# Altium PCB Wikiot.PcbDoc (part 2 of 2)
Units mil, origin at the board's own origin, x right, y up, seen from the top; angles counter-clockwise.
Board outline 3930 x 3935 mil, 2 copper layers (Top Layer, Bottom Layer); 175 components, 192 nets, 839 pads, 312 vias.
Unrouted connection lines stored in the file: 184.
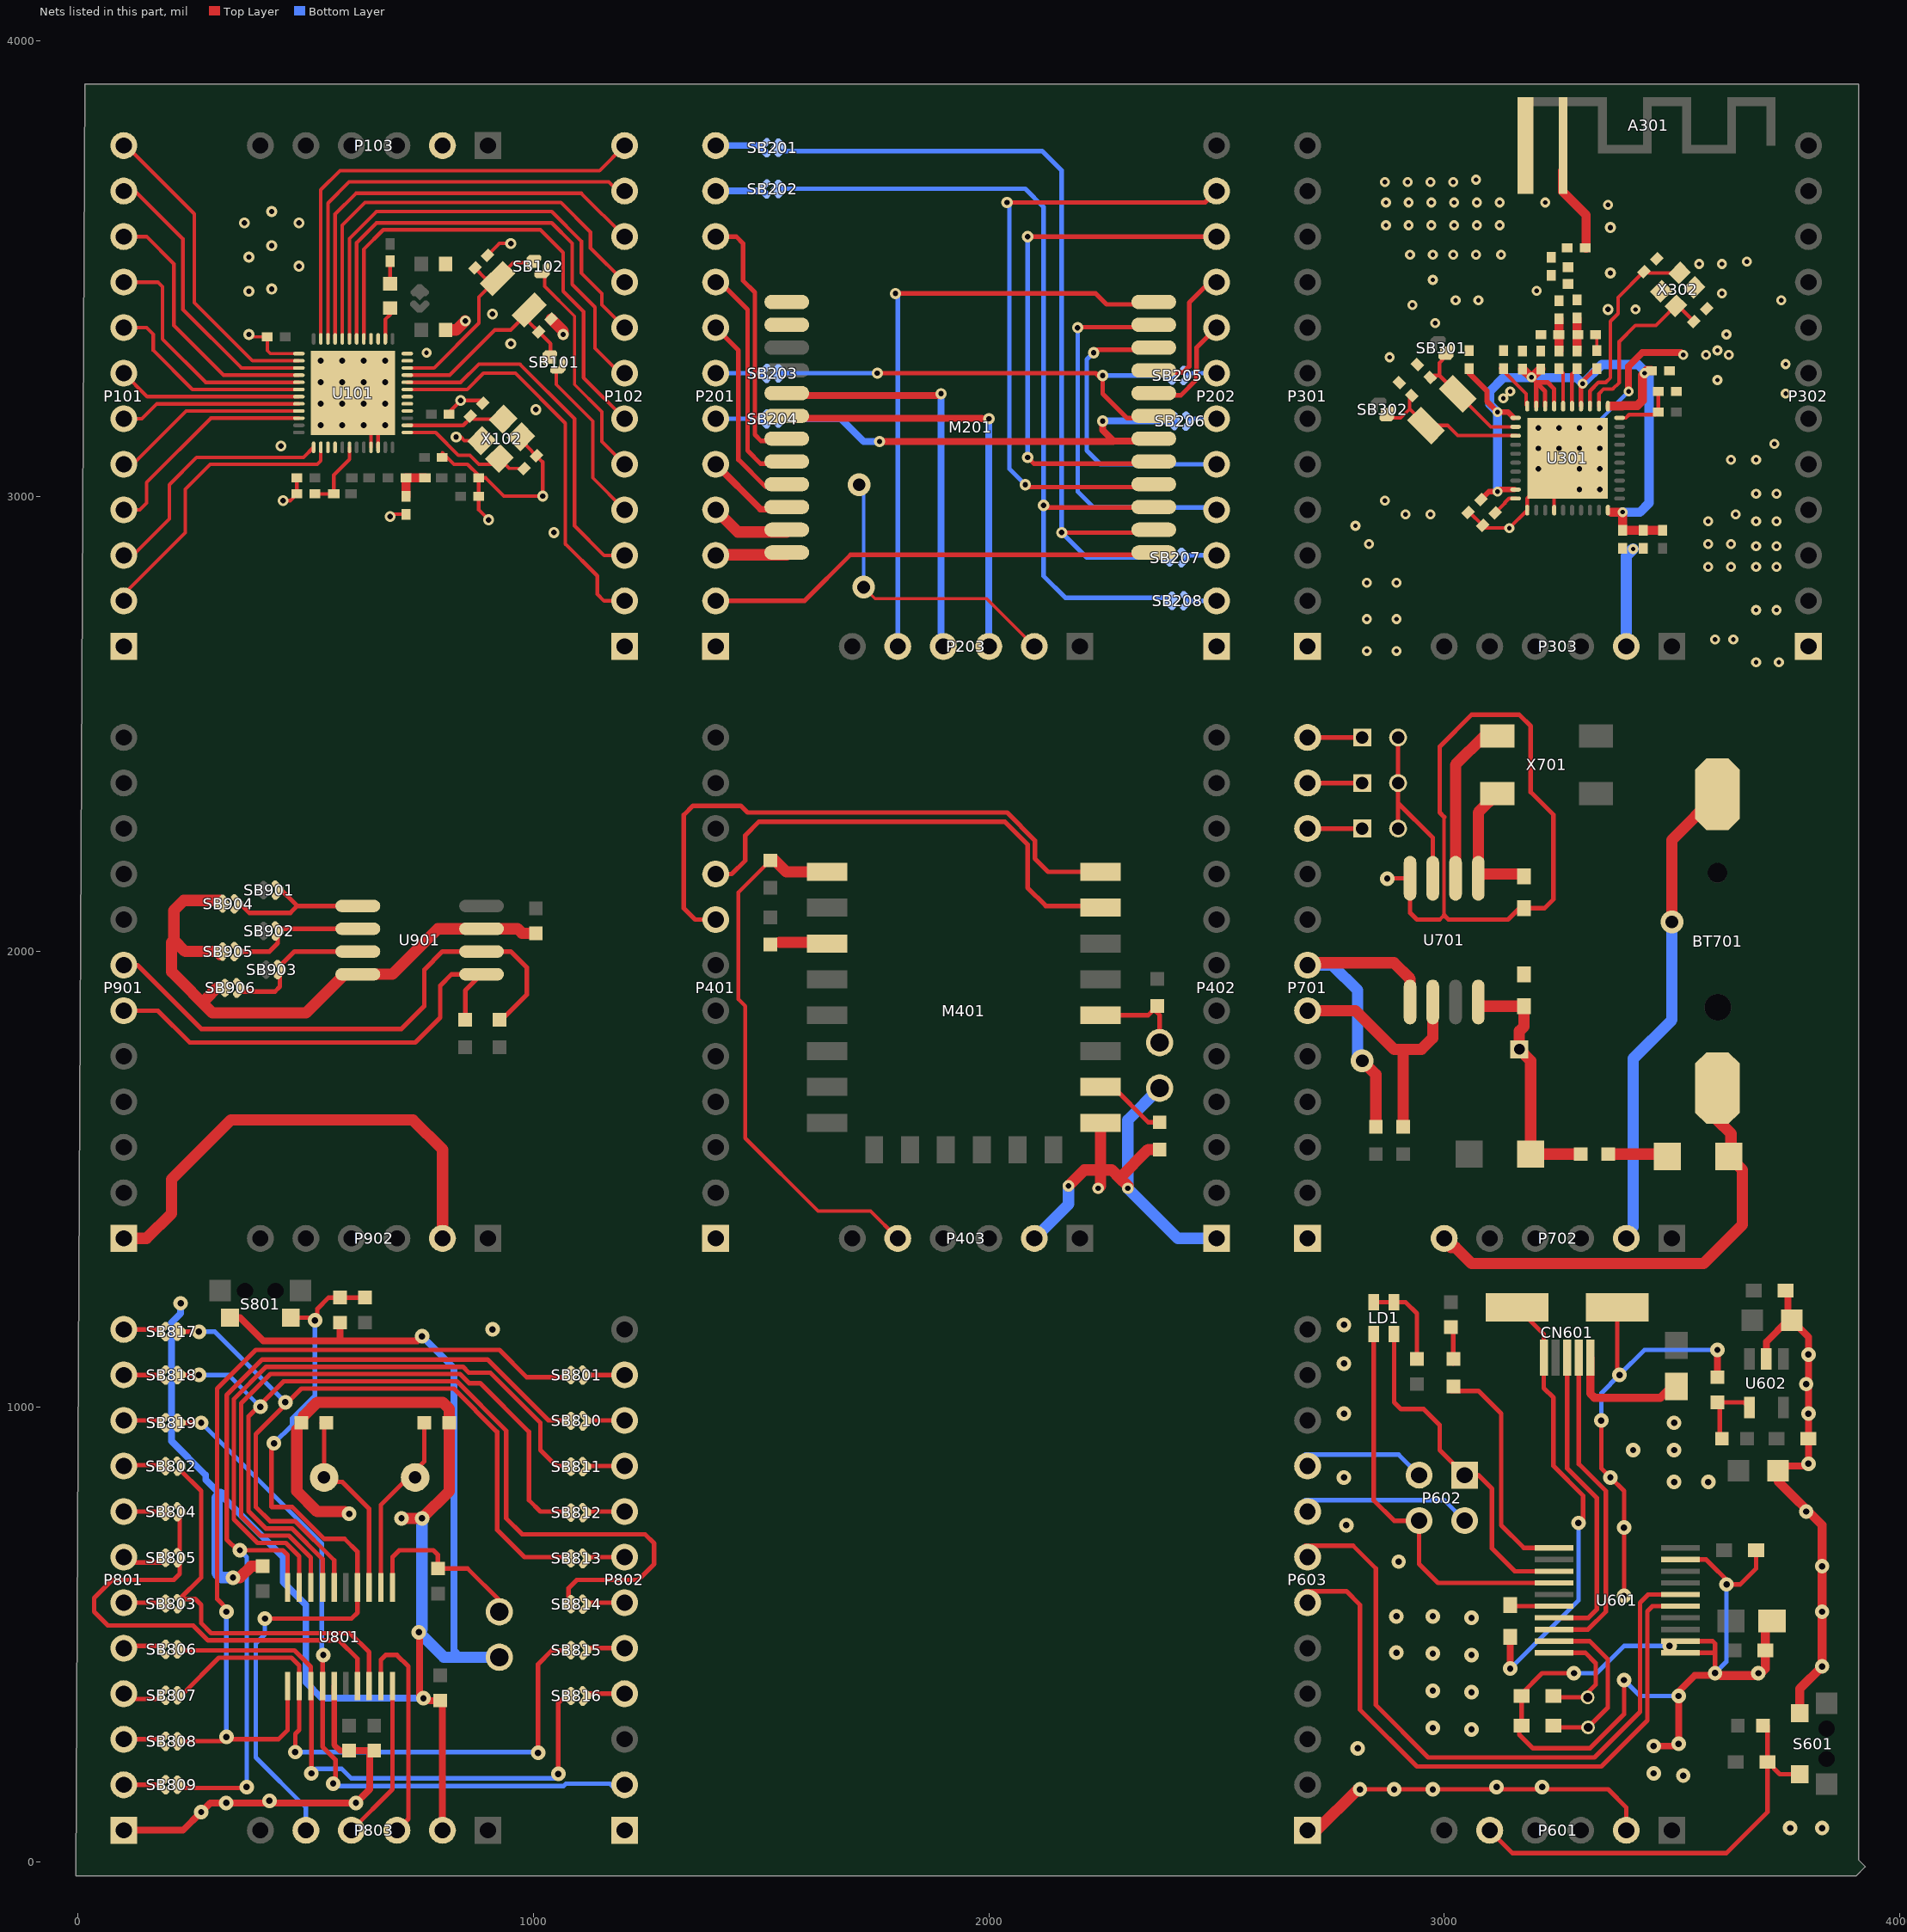
[diagram p2: the nets of this part, all layers, seen from the top]

## Via types
v1: diameter 22, hole 10, Top Layer to Bottom Layer, tented both sides, 125 vias
v2: diameter 32, hole 14, Top Layer to Bottom Layer, 96 vias
v3: diameter 24, hole 12, Top Layer to Bottom Layer, tented both sides, 33 vias
v4: diameter 25, hole 12, Top Layer to Bottom Layer, 19 vias
v5: diameter 25.98, hole 12.99, Top Layer to Bottom Layer, 16 vias
v6: diameter 25, hole 12, Top Layer to Bottom Layer, tented both sides, 13 vias
v7: diameter 50, hole 28, Top Layer to Bottom Layer, 8 vias
v8: diameter 30, hole 15, Top Layer to Bottom Layer, 2 vias

## Nets (pads, with @x,y where several pads share a name; then routed paths per layer and width w, separated by ;. In a path a pad name is that pad's centre, name@x,y a point inside that pad or via, vN(x,y) a via of type N, cw(c..) or ccw(c..) an arc to the next point about the centre after c; other vN are vias at no path point) (continued)
GND: A301.2 BT701.2 C101.2 C102.2 C103.2 C104.2 C105.2 C106.2 C108.1 C109.2 C110.2 C111.2 C112.2 C113.2 C114.2 C115.2 C301.2 C302.2 C303.2 C304.2 C305.2 C306.2 C307.2 C308.2 C310.2 C313.2 C314.2 C315.2 C316.2 C317.2 C318.2 C319.2 C601.1 C602.2 C603.1 C604.1 C605.1 C606.1 C608.1 C609.1 C610.1 C611.1 C701.2 C702.2 C801.1 C802.2 C803.2 C804.2 C805.2 C806.2 C807.2 C901.2 CN601.0 CN601.5 JP401.1 JP801.1 L303.2 M201.1 M201.2 M401.15 P101.1 P102.1 P103.2 P201.1 P202.1 P203.2 P301.1 P302.1 P303.2 P401.1 P402.1 P403.2 P601.2 P603.1 P701.1 P702.2 P801.1 P802.1 P803.2 P901.1 P902.2 R304.1 R403.1 R605.1 S601.1 S801.1 SB904.2 SB905.2 SB906.2 U101.13 U101.33 U101.34 U101.49 U301.1 U301.4 U301.41 U601.11 U601.12 U601.19 U602.2 U701.4 U801.15 U901.4 U901.7 X102.2 X102.4 X302.2 X302.4 | length 20500.5
  Top Layer w7: v3(375,3355) 380,3350 C115.2@415.31,3350 415.31,3319.69 422.01,3312.99 U101.13@484.53,3312.99 ; v7(1725,2800) 1750,2775 1995,2775 P203.2@2100,2670 ; 2999.78,2079.78 2999.78,2295.22 ; L303.2@3332.69,3355 3335,3352.69 C305.2@3335,3319.69
  Top Layer w8: v3(450,2990) 465.31,2990 C114.2@480.31,3005 C113.2@480.31,3040 ; U101.49@603.62,3226.38 U101.49@642.99,3187.01 ; U101.33@642.99,3107.28 U101.49@642.99,3187.01 ; U101.34@658.74,3107.28 658.74,3171.26 U101.49@642.99,3187.01 ; v3(685,2955) 690.31,2960.31 C110.2@720,2960.31 ; 799.69,3095 800,3095 825,3070 855,3070 879.69,3045.31 C111.2@879.69,3040 ; C105.2@814.69,3180 814.69,3184.69 v3(840,3210) 882.84,3210 C103.2@888.92,3203.92 ; v3(830,3130) 840,3130 848.08,3121.92 X102.4@885.99,3121.92 ; C104.2@898.92,3528.92 925,3555 v3(950,3555) ; v3(901.4,2948) 879.69,2969.72 C112.2@879.69,3000 C111.2@879.69,3040 ; X102.2@972.29,3130.27 972.29,3122.71 1020,3075 v3(1020,3000) 935,3000 895,3040 C111.2@879.69,3040 ; 2990,2070 2999.78,2079.78 ; C301.2@3052.55,2964.62 3055.37,2964.62 C315.2@3084.36,2935.62 3089.99,2930 v1(3143.21,2930) U301.1@3182.4,2969.19 3182.4,2994.79 U301.41@3241.46,3053.84 ; U301.4@3241.46,2969.19 U301.41@3241.46,3053.84 ; U301.41@3270.99,3083.37 U301.41@3241.46,3053.84
  Top Layer w10: v2@2810,160 v2(2815,160) v2(2890,160) v2(2975,160) 3360,160 3400,120 P601.2@3400,70 P601.2@3400,50 ; v2@2870,2165 2874.17,2160.83 U701.4@2925,2160.83 2925,2085 2940,2070 2990,2070 ; 2999.78,2079.78 3009.56,2070 3140,2070 3165,2095 C702.2@3175,2095 3220,2095 3240,2115 3240,2300 3190,2350 3190,2495 3165,2520 3060,2520 2990,2450 2990,2305 2999.78,2295.22 ; CN601.0@3159.7,1218.46 3218.76,1159.4 CN601.5@3218.76,1108.14 3218.76,1041.24 3240,1020 3240,870 3305,805 3305,745 v2(3295,745) ; v2(3285,415) 3215,415 3170,370 C606.1@3170,365 C605.1@3170,300 3165,295 3165,280 3195,250 3320,250 3395,325 v2(3395,400) ; v2(3345,970) 3345,865 v2(3365,845) 3395,815 v2(3395,735) v2(3395,585) v2@3395,580 ; CN601.0@3380.17,1218.46 3380.17,1074.83 v2(3385,1070) ; U601.11@3518.94,459.84 3594.84,459.84 ; U601.12@3518.94,485.43 3589.57,485.43 3594.84,480.16 3594.84,459.84 ; U601.19@3518.94,664.57 3575.43,664.57 3630,610 3650,610 3685,645 3685,680 C603.1@3685,685 ; v2(3594.84,415.16) 3594.84,459.84 ; C604.1@3710,465 C602.2@3710,515
  Top Layer w13: U801.15@562.2,386.73 562.2,257.8 575,245 C804.2@595,245
  Top Layer w15: P801.1@100,70 230,70 v2(270,110) 290,130 v2(325,130) v2(610,130) 640,160 C805.2@640,245 ; S801.1@333.07,1195.94 355.56,1195.94 406.5,1145 570,1145 ; C801.1@575,1185 575,1150 570,1145 ; C804.2@595,245 C805.2@640,245 ; C805.2@650,245 C805.2@640,245 ; v2@750,510 750,365 760,355 C806.2@795,355 800,350 P803.2@800,70 ; v2(755,1155) 745,1145 570,1145 ; v2(3145,425) C601.1@3145,495 ; v1(3405,3230) 3405,3285 3435,3315 3520,3315 v1(3525,3310) ; v2@3470,255 3515,255 3515,375 3550,410 v2@3607.87,410 ; R605.1@3600,1065 v2(3600,1125) ; U602.2@3707.6,1105 3707.6,1142.6 3755,1190 C608.1@3763.31,1190 ; C610.1@3733.31,870 3795,870 v2(3800,875) C611.1@3800,930 v2(3800,1115) 3800,1153.31 C608.1@3763.31,1190 ; C609.1@3755,1255 3755,1198.31 C608.1@3763.31,1190
  Top Layer w20: v2@3607.87,410 3690,410 3705,425 C604.1@3705,465 3705,515 C602.2@3720,530 ; C610.1@3733.31,860 3733.31,836.69 3830,740 v2(3830,650) v2(3830,550) v2(3830,430) 3780.94,380.94 S601.1@3780.94,326.93
  Top Layer w25: P901.1@100,1370 150,1370 205,1425 205,1500 335,1630 735,1630 800,1565 P902.2@800,1370 ; 280,1895 305,1920 SB906.2@322,1920 ; SB905.2@312,1993 SB905.2@312,1994.5 ; SB904.2@312,2112 232,2112 210,2090 210,2025 ; SB905.2@317,2000 235,2000 210,2025 ; v2(340,625) 355,625 380,650 C807.2@405,650 ; C803.2@480,950 480,815 525,770 v2@585,770 ; 495,980 525,1010 800,1010 815,995 C802.2@815,965 815,815 v2(755,755) v2(710,755) ; C109.2@806.57,3365 830,3365 v3(850,3385) ; C901.2@1005,2040 975,2040 965,2050 U901.7@885.83,2050 790,2050 690,1950 U901.4@614.17,1950 585,1950 500,1865 295,1865 205,1955 205,2020 210,2025 ; C101.2@1038.92,3388.92 1065,3362.84 v3(1065,3355) ; v4(2175,1485) 2210,1520 2245.16,1520 ; v4(2240,1480) 2245.16,1485.16 2245.16,1520 ; M401.15@2245.16,1623.82 2245.16,1520 ; v4(2305,1480) 2305,1485 2287.5,1502.5 ; R403.1@2375,1565 2350,1565 2287.5,1502.5 ; P603.1@2700,70 2720,70 v2@2810,160 ; v7(3500,2065) 3500,2245 BT701.2@3600,2345 ; 2245.16,1520 2270,1520 2287.5,1502.5
  Bottom Layer w7: v7(1715,3025) 1725,3015 v7(1725,2800)
  Bottom Layer w8: v6(3342,3150) 3342,3167 v1(3405,3230)
  Bottom Layer w10: v2(3145,425) 3295,575 v2(3295,745) v2@3295,750 ; v2(3285,415) 3335,415 3395,475 v2(3495,475) ; v2(3345,970) 3345,1030 v2(3385,1070) 3440,1125 v2(3600,1125) ; v2(3395,400) 3430,365 v2(3515,365) ; v2(3594.84,415.16) 3620,440.32 v2(3620,610)
  Bottom Layer w15: v2@225,1230 v2(225,1227.5) 225,1205 205,1185 205,925 280,850 280,840 312.5,807.5 450,670 450,615 500,565 500,395 535,360 v2(758.23,360) ; v2(755,1155) 825,1085 825,465 840,450
  Bottom Layer w25: 312.5,807.5 305,800 305,635 315,625 v2(340,625) ; v2(755,755) 755,511.77 v2(748.23,505) 803.23,450 840,450 JP801.1@925,450 ; P403.2@2100,1370 2175,1445 v4(2175,1485) ; JP401.1@2375,1700 2305,1630 v4(2305,1480) 2415,1370 P402.1@2500,1370 ; P303.2@3400,2670 3400,2869 v1(3415,2884) ; P702.2@3415,1395 3415,1765 3500,1850 v7(3500,2065)
  other v1: 3685,2635 3735,2635 2830,2660 2895,2660 3595,2685 3635,2685 2830,2730 2895,2730 3685,2750 3730,2750 2830,2810 2895,2810 3580,2845 3630,2845 3685,2845 3730,2845 3685,2890 3730,2890 2835,2895 3580,2895 3630,2895 2805,2935 3580,2945 3685,2945 3730,2945 2915,2960 2970,2960 3640,2960 2870,2990 3685,3005 3730,3005 3630,3080 3685,3080 3725,3115 3130,3215 3750,3225 3145,3230 3600,3255 3750,3290 2880,3305 3575,3310 3625,3310 765,3315 3600,3320 3620,3355 2980,3380 3420,3410 2930,3420 3025,3430 3075,3430 3740,3430 3610,3445 3203,3451 2975,3475 3560,3510 3610,3510 3665,3515 2925,3530 2975,3530 3020,3530 3070,3530 3125,3530 2872,3595 2922,3595 2972,3595 3022,3595 3072,3595 3122,3595 3360,3640 2872,3645 2922,3645 2972,3645 3022,3645 3072,3645 3122,3645 3222,3645 2870,3690 2920,3690 2970,3690 3020,3690 3070,3695
  other v2: 3760,75 3830,75 420,135 3115,165 3215,165 3525,190 3460,195 2810,250 3460,255 3515,260 3060,291.67 2975,295 3060,373.33 2975,376.67 3690,415 3060,455 2975,458.33 2895,460 3060,536.67 2895,540 2975,540 2900,660 2785,740 595,765 3795,770 3505,835 3580,835 2780,845 3415,905 3505,905 3505,965 2780,985 3800,985 3795,1050 2780,1095 910,1170 2780,1180 2875,2160
  other v3: 1045,2920 445,3110 1005,3190 950,3335 910,3400 3360,3410 375,3450 425,3455 3365,3490 485,3505 375,3525 425,3550 3365,3590 365,3600 485,3600 425,3625
  other v5: 532.76,3155.51 580,3155.51 627.24,3155.51 674.49,3155.51 532.76,3202.76 580,3202.76 627.24,3202.76 674.49,3202.76 532.76,3250 580,3250 627.24,3250 674.49,3250 532.76,3297.24 580,3297.24 627.24,3297.24 674.49,3297.24
  other v6: 3297,3015 3342,3015 3207,3060 3297,3060 3342,3060 3207,3105 3252,3105 3297,3105 3342,3105 3207,3150 3252,3150 3297,3150
NACT: R601.1 U601.1 | length 512.4
  Top Layer w10: R601.1@3015,1035 3075,1035 3125,985 3125,740 3174.84,690.16 U601.1@3241.06,690.16
NetA301_1: A301.1 L302.1 | length 191.3
  Top Layer w20: A301.1@3260.11,3714.15 3260.11,3668.89 3311.99,3617.01 L302.1@3311.99,3544.37
NetC107_2: C107.2 C110.1 L103.1 | length 82.1
  Top Layer w20: C110.1@720,2999.68 719.69,3000 C107.2@719.69,3040 L103.1@761.3,3040
NetC301_1: C301.1 C302.1 C303.1 C304.1 C305.1 C306.1 C307.1 C308.1 FB301.1 U301.10 U301.21 U301.24 U301.27 U301.28 U301.29 U301.31 U301.39 | length 1881.8
  Top Layer w10: v1@3192,3260 3202,3250 3202.13,3250 3221.58,3230.55 U301.28@3221.58,3197.42 ; U301.29@3201.89,3197.11 3201.89,3248.92 ; 3202.98,3250 3227,3250 3241.26,3235.74 U301.27@3241.26,3197.74 ; U301.24@3300.32,3198.68 3300.32,3243.32 v1@3302.49,3245.49 ; v1(3304,3247) 3304,3252 C305.1@3332,3280
  Top Layer w12: C303.1@3055,3285.31 3055,3270 3093.92,3231.08 3093.92,3207.8 v1(3116.86,3184.86) 3140.14,3184.86 U301.31@3152.5,3172.5 ; C301.1@3080.38,2992.45 3097.93,3010 v1(3117,3010) 3121.47,3014.47 U301.39@3154.53,3014.47 ; v1@3302.49,3245.49 v1(3304,3247)
  Top Layer w20: C306.1@3172,3279.41 3191.41,3260 3192,3260 3211.41,3279.41 C307.1@3212,3279.41 ; 3365,3198 3391,3198 3391.91,3198.91 3423.91,3198.91 3435,3210 3435,3265.99 3444.96,3275.95 3454.37,3275.95 C304.1@3455.31,3275 ; 3367,2965 v1(3392,2965) 3392,2925 C302.1@3432,2925 ; C302.1@3437,2924.68 FB301.1@3480,2924.68
  Bottom Layer w20: v1(3117,3010) 3116.86,3010.14 v1(3116.86,3184.86) 3100,3201.72 3100,3230 3130,3260 3291,3260 v1(3304,3247) 3346,3289 3426,3289 3450,3265 3450,2985 3430,2965 v1(3392,2965)
  other v1: 3191.86,3260.86 3440,3270
NetC309_1: C309.1 C311.1 L303.1 | length 70
  Top Layer w20: C311.1@3291.99,3319.37 C309.1@3291.99,3389.37
NetC309_2: C309.2 L301.2 L304.1
NetC310_1: C310.1 L301.1 L302.2
NetC311_2: C311.2 U301.25 | length 85.7
  Top Layer w8: U301.25@3280.63,3198.37 3280.63,3268.01 C311.2@3291.99,3279.37
NetC312_1: C312.1 C313.1 L304.2 | length 70
  Top Layer w20: C312.1@3251.99,3319.37 L304.2@3251.99,3389.37
NetC312_2: C312.2 U301.26 | length 87
  Top Layer w8: C312.2@3251.99,3279.37 3260.95,3270.41 U301.26@3260.95,3196.05
NetC314_1: C314.1 SB301.2 U301.32 X301.1 | length 280.9
  Top Layer w8: C314.1@2973.92,3261.08 2977.84,3265 2989.6,3265 ; SB301.2@3003.42,3306.68 2989.6,3292.85 2989.6,3265 ; U301.32@3159,3152 3158.73,3152.27 3102.33,3152.27 X301.1@3029.8,3224.8 2989.6,3265
NetC315_1: C315.1 U301.40 | length 59.2
  Top Layer w8: C315.1@3112.2,2963.46 3133,2984.26 3133,2985.34 3142.44,2994.79 U301.40@3157.79,2994.79
NetC316_1: C316.1 SB302.2 U301.33 X301.2 | length 337.5
  Top Layer w7: SB302.2@2877.78,3172.32 2878.37,3171.73 2904.16,3171.73 2923.92,3191.48
  Top Layer w8: C316.1@2923.92,3216.08 2923.92,3191.48 X301.2@2960.2,3155.2 3007.8,3155.2 3030,3133 U301.33@3158,3133
NetC317_1: C317.1 U301.23 X302.1 | length 423.1
  Top Layer w8: U301.23@3320,3197 3320,3231 3339,3250 3355,3250 3365,3260 3365,3383.89 3382,3400.89 3382,3436.35 C317.1@3438.91,3493.26 ; C317.1@3448.9,3490.33 X302.1@3517.1,3490.33
NetC318_1: C318.1 U301.22 X302.3 | length 364.2
  Top Layer w8: U301.22@3340,3197 3340,3225 3350,3235 3370,3235 3384.5,3249.5 3384.5,3339.5 3420,3375 3465,3375 3495,3405 ; X302.3@3508.75,3417.95 3514.21,3417.95 C318.1@3548.51,3383.65
NetC319_1: C319.1 R303.2 U301.20 | length 137.7
  Top Layer w8: U301.20@3383.05,3171.95 3399.14,3171.95 3406.09,3178.91 3464.22,3178.91 R303.2@3470.31,3185 C319.1@3470.31,3230
NetC601_2: C601.2 U601.6 | length 101.4
  Top Layer w10: C601.2@3145,575 3157.8,562.2 U601.6@3241.06,562.2
NetC605_2: C605.2 U601.9 Y601.1 | length 380
  Top Layer w10: C605.2@3240,300 3244,296 Y601.1@3316,296 3359.28,339.28 3359.28,445.72 3319.57,485.43 U601.9@3241.06,485.43
NetC606_2: C606.2 U601.10 Y601.2 | length 260.1
  Top Layer w10: C606.2@3240,365 3243,362 Y601.2@3315,362 3315,372 3333,390 3333,437 3310.16,459.84 U601.10@3241.06,459.84
NetC607_1: C607.1 P601.5 R603.2 S601.2 | length 952.2
  Top Layer w10: P601.5@3100,70 3150,20 3620,20 3710,110 C607.1@3710,220 ; R603.2@3700,305 3705,305 3710,300 C607.1@3710,220 ; S601.2@3780.94,193.07 3736.93,193.07 C607.1@3710,220
NetC701_1: C701.1 D701.2 R701.1 T701.1 U701.8 | length 553.3
  Top Layer w25: U701.8@3075,1889.17 3084.17,1880 C701.1@3175,1880 3175,1835 3165,1825 T701.1@3165,1785 3190,1760 D701.2@3190,1555 R701.1@3300,1555
NetC702_1: C702.1 U701.1 X701.1 | length 302.3
  Top Layer w25: X701.1@3116.73,2347.01 3075,2305.28 U701.1@3075,2160.83 3084.17,2170 C702.1@3170,2170
NetC802_1: C802.1 U801.2 X801.1 | length 401.3
  Top Layer w10: U801.2@664.57,603.27 664.57,784.57 760,880 C802.1@760,965
NetC803_1: C803.1 U801.3 X801.2 | length 428.2
  Top Layer w10: C803.1@535,965 540,960 540,835 580,835 638.98,776.02 U801.3@638.98,603.27
NetCN601_1: CN601.1 F601.2 | length 300.5
  Top Layer w18: CN601.1@3321.12,1108.14 3321.12,1028.88 3330,1020 3475,1020 F601.2@3520,1065
NetCN601_2: CN601.2 U601.8 | length 712.9
  Top Layer w10: U601.8@3241.06,511.02 3316.02,511.02 3355,550 3355,815 3295.53,874.47 CN601.2@3295.53,1108.14
NetCN601_3: CN601.3 U601.7 | length 681.6
  Top Layer w10: U601.7@3241.06,536.61 3316.61,536.61 3335,555 3335,800 3269.94,865.06 CN601.3@3269.94,1108.14
NetD601_2: D601.2 R601.2 | length 87.1
  Top Layer w10: D601.2@3015,1180 3020,1175 R601.2@3020,1095
NetD702_2: D702.2 R701.2 | length 132.1
  Top Layer w25: R701.2@3360,1555 3485,1555 D702.2@3490,1550
NetJP401_2: JP401.2 M401.18 R402.2 | length 200.2
  Top Layer w10: M401.18@2245.16,1860.04 2350.04,1860.04 2362.5,1872.5 2375,1860 JP401.2@2375,1800
NetJP801_2: JP801.2 R801.2 U801.1 | length 406
  Top Layer w10: U801.1@690.16,603.27 690.16,670.16 705,685 780,685 790,675 R801.2@790,645 855,645 925,575 JP801.2@925,540
NetL101_1: L101.1 L102.2 | length 52.1
  Top Layer w8: L102.2@685,3471.57 L101.1@685,3523.7
NetL102_1: L102.1 U101.2 | length 77.3
  Top Layer w8: U101.2@674.49,3345.47 674.49,3387.91 685,3398.43 L102.1@685,3418.43
NetLD1_3: LD1.3 LD1.4 R602.2 | length 205.4
  Top Layer w10: LD1.3@2845,1230 LD1.4@2890,1230 2915,1230 2940,1205 R602.2@2940,1105
NetM401_3: M401.3 R401.1 | length 105.8
  Top Layer w25: 1540,2020 1642.28,2020 M401.3@1644.76,2017.52
NetM401_16: M401.16 R403.2 | length 157
  Top Layer w10: M401.16@2245.16,1702.56 2272.44,1702.56 2350,1625 R403.2@2370,1625
NetP201_6: P201.6 SB204.1 | length 110.3
  Bottom Layer w10: P201.6@1400,3170 1499,3170 SB204.1@1507,3162
NetP201_7: P201.7 SB203.1 | length 110.3
  Bottom Layer w10: P201.7@1400,3270 1499,3270 SB203.1@1507,3262
NetP201_11: P201.11 SB202.1 | length 108.2
  Bottom Layer w15: P201.11@1400,3670 1504,3670 SB202.1@1507,3667
NetP201_12: P201.12 SB201.1 | length 112.4
  Bottom Layer w15: P201.12@1400,3770 1494,3770 SB201.1@1507,3757
NetP202_2: P202.2 SB208.1 | length 70.3
  Bottom Layer w10: SB208.1@2433,2778 2441,2770 P202.2@2500,2770
NetP202_3: P202.3 SB207.1 | length 77.4
  Bottom Layer w10: SB207.1@2428,2857 2441,2870 P202.3@2500,2870
NetP202_6: P202.6 SB206.1 | length 63.2
  Bottom Layer w10: SB206.1@2438,3173 2441,3170 P202.6@2500,3170
NetP202_7: P202.7 SB205.1 | length 68.2
  Bottom Layer w10: SB205.1@2433,3273 2436,3270 P202.7@2500,3270
NetP701_6: P701.6 R702.1 U701.6 | length 564.7
  Top Layer w25: P701.6@2700,1870 2805,1870 2890,1785 2950,1785 2975,1810 U701.6@2975,1889.17 ; R702.1@2910,1615 2910,1780
NetP701_7: P701.7 R703.1 U701.5 | length 719.7
  Top Layer w25: P701.7@2715,1975 2890,1975 2925,1940 U701.5@2925,1889.17 ; v7(2820,1760) 2850,1730 ; R703.1@2850,1615 2850,1725
  Bottom Layer w25: P701.7@2700,1970 2755,1970 2810,1915 2810,1770 v7(2820,1760)
NetP701_10: P701.10 W703.1 | length 120
  Top Layer w10: P701.10@2700,2270 W703.1@2820,2270
NetP701_11: P701.11 W702.1 | length 120
  Top Layer w10: P701.11@2700,2370 W702.1@2820,2370
NetP701_12: P701.12 W701.1 | length 110
  Top Layer w10: P701.12@2700,2470 W701.1@2810,2470
NetP801_2: P801.2 SB809.1 | length 90.3
  Top Layer w10: P801.2@100,170 179,170 SB809.1@187,162
NetP801_3: P801.3 SB808.1 | length 92.1
  Top Layer w10: P801.3@100,270 174.68,270 SB808.1@187,257.68
NetP801_4: P801.4 SB807.1 | length 91.8
  Top Layer w10: P801.4@100,370 111.65,358.35 SB807.1@187,358.35
NetP801_5: P801.5 SB806.1 | length 89.1
  Top Layer w10: P801.5@100,470 105.03,475.03 SB806.1@187,475.03
NetP801_10: P801.10 SB819.1 | length 92.4
  Top Layer w10: P801.10@100,970 174,970 SB819.1@187,957
NetP801_11: P801.11 SB818.1 | length 92.4
  Top Layer w10: P801.11@100,1070 174,1070 SB818.1@187,1057
NetP801_12: P801.12 SB817.1 | length 88.2
  Top Layer w10: P801.12@100,1170 184,1170 SB817.1@187,1173
NetP802_4: P802.4 SB816.1 | length 88.2
  Top Layer w10: SB816.1@1113,373 1116,370 P802.4@1200,370
NetP802_5: P802.5 SB815.1 | length 88.5
  Top Layer w10: SB815.1@1113,473.71 1116.71,470 P802.5@1200,470
NetP802_6: P802.6 SB814.1 | length 91.8
  Top Layer w10: SB814.1@1113,558.43 1124.57,570 P802.6@1200,570
NetP802_7: P802.7 SB813.1 | length 89.1
  Top Layer w10: SB813.1@1113,675.14 1118.14,670 P802.7@1200,670
NetP802_8: P802.8 SB812.1 | length 89.4
  Top Layer w10: SB812.1@1113,775.86 1118.86,770 P802.8@1200,770
NetP802_9: P802.9 SB811.1 | length 89.7
  Top Layer w10: SB811.1@1113,876.57 1119.57,870 P802.9@1200,870
NetP802_10: P802.10 SB810.1 | length 90.6
  Top Layer w10: SB810.1@1113,961.29 1121.71,970 P802.10@1200,970
NetP802_11: P802.11 SB801.1 | length 90.3
  Top Layer w10: SB801.1@1113,1078 1121,1070 P802.11@1200,1070
NetP901_6: P901.6 R901.1 U901.5 | length 1032.8
  Top Layer w10: P901.6@100,1870 175,1870 245,1800 740,1800 795,1855 795,1925 820,1950 U901.5@885.83,1950 850,1914.17 R901.1@850,1850
NetP901_7: P901.7 R902.1 U901.6 | length 1217.5
  Top Layer w10: P901.7@100,1970 130,1970 270,1830 710,1830 760,1880 760,1960 800,2000 U901.6@885.83,2000 950,2000 985,1965 985,1905 930,1850 R902.1@925,1850
NetR304_2: R304.2 U301.30 | length 104.3
  Top Layer w8: R304.2@3123.92,3281.08 3180,3225 U301.30@3180,3200
NetR604_2: R604.2 R605.2 U602.4 | length 156.9
  Top Layer w10: R604.2@3605,930 3605,1005 R605.2@3600,1010 3658.9,1010 U602.4@3670.2,998.7
NetSB901_1: SB901.1 SB904.1 U901.1 | length 344.8
  Top Layer w10: SB904.1@348,2113 376,2085 466,2085 481,2100 ; SB901.1@438,2143 481,2100 ; U901.1@614.17,2100 481,2100
NetSB902_1: SB902.1 SB905.1 U901.2 | length 297.2
  Top Layer w10: SB905.1@348,1992 356,2000 420,2000 438,2018 SB902.1@438,2037 ; SB902.1@438,2053 441,2050 U901.2@614.17,2050
NetSB903_1: SB903.1 SB906.1 U901.3 | length 324
  Top Layer w10: SB906.1@353,1912 432,1912 443,1923 SB903.1@443,1952 SB903.1@443,1968 475,2000 U901.3@614.17,2000
NetU701_2: U701.2 X701.4 | length 367
  Top Layer w25: U701.2@3025,2160.83 3025,2410 3087.99,2472.99 X701.4@3116.73,2472.99
NetU701_3: U701.3 W701.2 W702.2 W703.2 | length 397
  Top Layer w10: W703.2@2898.74,2270 2898.74,2326.26 ; W701.2@2898.74,2470 W702.2@2898.74,2370 2898.74,2326.26 ; U701.3@2975,2160.83 2975,2250 2898.74,2326.26
NRST: C801.2 M201.24 M401.1 P203.5 P403.5 P803.5 R1.1 R802.1 S801.2 U801.4 | length 4305.4
  Top Layer w8: R1.1@1520,2200 1450,2130 1450,1895 1465,1880 1465,1590 1625,1430 1740,1430 P403.5@1800,1370
  Top Layer w10: v2(410,535) 600,535 613.39,548.39 U801.4@613.39,603.27 613.39,681.61 585,710 540,710 470,780 425,780 424.57,780.43 424.57,920 v2(430,920) ; S801.2@475.94,1190.94 461.93,1190.94 S801.2@466.93,1195.94 519.06,1195.94 525,1190 525,1215 550,1240 C801.2@575,1240 R802.1@620,1240 ; v4(1795,3445) 2235,3445 2258.7,3421.3 M201.24@2362.09,3421.3
  Top Layer w25: R1.1@1530,2200 1555,2175 M401.1@1644.76,2175
  Bottom Layer w10: v2(410,535) 410,500 390,480 390,230 500,120 P803.5@500,70 ; v2(430,920) 470,960 470,975 520,1025 v2(520,1190) ; v4(1795,3445) 1800,3440 P203.5@1800,2670
P0.00: U101.4
P0.0/AIN0: M201.23 P202.4 | length 859.2
  Top Layer w10: v4(2195,3370) 2190,3370 2191.3,3371.3 M201.23@2362.09,3371.3
  Bottom Layer w10: v4(2195,3370) 2195,3010 2230,2975 2495,2975 P202.4@2500,2970
P0.01: P102.6 U101.5 | length 1093.9
  Top Layer w8: U101.5@627.24,3345.47 627.24,3542.24 670,3585 1015,3585 1065,3535 1065,3450 1110,3405 1110,3260 P102.6@1200,3170
P0.1/AIN1: M201.22 P202.5 | length 653.3
  Top Layer w10: v4(2230,3315) 2236.3,3321.3 M201.22@2362.09,3321.3
  Bottom Layer w10: v4(2230,3315) 2215,3300 2215,3100 2245,3070 P202.5@2500,3070
P0.02: P102.7 U101.6 | length 1059.7
  Top Layer w8: U101.6@611.5,3345.47 611.5,3556.5 655,3600 1040,3600 1085,3555 1085,3465 1135,3415 1135,3325 1190,3270 P102.7@1200,3270
P0.2/AIN2/RX1: M201.21 P202.9 | length 302.2
  Top Layer w10: M201.21@2362.09,3271.3 2426.3,3271.3 2440,3285 2440,3425 2485,3470 P202.9@2500,3470
P0.03: P102.8 U101.7 | length 1010.3
  Top Layer w8: U101.7@595.75,3345.47 595.75,3565.75 655,3625 1040,3625 1105,3560 1105,3490 1150,3445 1150,3420 P102.8@1200,3370
P0.3/AIN3/TX1: M201.20 P202.8 | length 240.5
  Top Layer w10: M201.20@2362.09,3221.3 2421.3,3221.3 2455,3255 2455,3277.37 2456,3278.37 2456,3326 P202.8@2500,3370
P0.04: P102.9 U101.8 | length 983.2
  Top Layer w8: U101.8@580,3345.47 580,3595 630,3645 1060,3645 1125,3580 1125,3545 P102.9@1200,3470
P0.4/AIN4/CTS1: M201.19 SB203.2 SB205.2 | length 1036.6
  Top Layer w10: v4(1755,3270) 2235,3270 2250,3255 2250,3225 2303.7,3171.3 M201.19@2362.09,3171.3
  Bottom Layer w10: SB203.2@1538,3270 1750,3270 v4@1755,3275 ; v4(2250,3265) SB205.2@2402,3265
P0.05: P102.10 U101.9 | length 967.8
  Top Layer w8: U101.9@564.25,3345.47 564.25,3619.25 610,3665 1105,3665 P102.10@1200,3570
P0.5/AIN5/RTS1: M201.18 SB204.2 SB206.2 | length 1055.9
  Top Layer w15: v4(1760,3120) 2272.4,3120 2273.7,3121.3 ; v4(2250,3165) 2250,3145 2273.7,3121.3 ; M201.18@2362.09,3121.3 2273.7,3121.3
  Bottom Layer w15: SB204.2@1538,3170 1675,3170 1725,3120 v4(1760,3120) ; v4(2250,3165) SB206.2@2407,3165
P0.06: P102.11 U101.10 | length 977.1
  Top Layer w8: U101.10@548.5,3345.47 548.5,3643.5 595,3690 1165,3690 1185,3670 P102.11@1200,3670
P0.6/AIN6: M201.17 P202.10 | length 1182.8
  Top Layer w10: v4(2085,3085) 2098.7,3071.3 M201.17@2362.09,3071.3 ; v4(2085,3570) P202.10@2500,3570
  Bottom Layer w10: v4(2085,3085) v4(2085,3570)
P0.07: P102.12 U101.11 | length 1034.8
  Top Layer w8: U101.11@532.76,3345.47 532.76,3672.76 575,3715 1145,3715 P102.12@1200,3770
P0.7/AIN7: M201.16 P202.11 | length 1391.6
  Top Layer w10: v4(2040,3645) 2475,3645 P202.11@2500,3670 ; v4(2080,3025) 2085,3020 2360.79,3020 M201.16@2362.09,3021.3
  Bottom Layer w10: v4(2040,3645) 2045,3640 2045,3060 v4(2080,3025)
P0.08: P101.12 U101.14 | length 694.6
  Top Layer w8: P101.12@100,3770 105,3770 255,3620 255,3425 382.76,3297.24 U101.14@484.53,3297.24
P0.09: P101.11 U101.15 | length 636.2
  Top Layer w8: P101.11@100,3670 125,3670 230,3565 230,3410 358.5,3281.5 U101.15@484.53,3281.5
P0.10: P101.10 U101.16 | length 589.6
  Top Layer w8: P101.10@100,3570 150,3570 210,3510 210,3375 319.25,3265.75 U101.16@484.53,3265.75
P0.11: P101.9 U101.17 | length 543
  Top Layer w8: P101.9@100,3470 175,3470 185,3460 185,3345 280,3250 U101.17@484.53,3250
P0.12: P101.8 U101.18 | length 461.3
  Top Layer w8: P101.8@100,3370 150,3370 165,3355 165,3320 250.75,3234.25 U101.18@484.53,3234.25
P0.13: P101.7 U101.19 | length 405.9
  Top Layer w8: P101.7@100,3270 151.5,3218.5 U101.19@484.53,3218.5
P0.14: P101.6 U101.20 | length 398.1
  Top Layer w8: P101.6@100,3170 140,3170 172.76,3202.76 U101.20@484.53,3202.76
P0.15: P101.5 U101.21 | length 433
  Top Layer w8: P101.5@100,3070 120,3070 237.01,3187.01 U101.21@484.53,3187.01
P0.16: P101.4 U101.22 | length 494.3
  Top Layer w8: P101.4@100,2970 135,2970 150,2985 150,3030 291.26,3171.26 U101.22@484.53,3171.26
P0.17: P101.3 U101.25 | length 559.2
  Top Layer w8: P101.3@100,2870 120,2870 200,2950 200,3025 260,3085 494.72,3085 U101.25@517.01,3107.28
P0.18: P101.2 U101.26 | length 654.2
  Top Layer w8: P101.2@100,2770 100,2785 235,2920 235,3015 290,3070 525,3070 532.76,3077.76 U101.26@532.76,3107.28
P0.19: U101.27
P0.20: U101.28
P0.21: U101.40
P0.22: U101.41
P0.23: U101.42
P0.24: P102.2 U101.43 | length 877.9
  Top Layer w8: U101.43@722.72,3234.25 854.25,3234.25 890,3270 960,3270 1070,3160 1070,2895 1140,2825 1140,2785 1155,2770 P102.2@1200,2770
P0.25: P102.3 U101.44 | length 805.5
  Top Layer w8: U101.44@722.72,3250 840,3250 880,3290 970,3290 1090,3170 1090,2935 1155,2870 P102.3@1200,2870
P0.26: P102.4 SB101.1 | length 369.6
  Top Layer w7: SB101.1@1052.07,3276.62 1050,3274.54 1050,3245 1130,3165 1130,3040 P102.4@1200,2970
P0.27: P102.5 SB102.1 | length 488.9
  Top Layer w7: SB102.1@1024.33,3486.18 1024.33,3460.67 1090,3395 1090,3245 1150,3185 1150,3120 P102.5@1200,3070
P0.28: U101.47
P0.29: U101.48
P0.30: U101.3
P1.0/T0: M201.15 SB202.2 SB208.2 | length 1951.1
  Top Layer w10: v4(2120,2980) 2125,2975 2358.39,2975 M201.15@2362.09,2971.3
  Bottom Layer w10: SB202.2@1538,3675 2080,3675 2120,3635 v4(2120,2980) 2120,2825 2168,2777 SB208.2@2397,2777
P1.1/T1: M201.14 SB201.2 SB207.2 | length 1892.2
  Top Layer w10: v4(2160,2920) 2360.79,2920 M201.14@2362.09,2921.3
  Bottom Layer w10: SB201.2@1543,3758 2117,3758 2160,3715 v4(2160,2920) 2215,2865 SB207.2@2397,2865
P1.2/SS: M201.13 P201.2 | length 1004
  Top Layer w10: P201.2@1400,2770 1595,2770 1696.3,2871.3 M201.13@2362.09,2871.3
P1.3/SCK: M201.12 P201.3 | length 156.8
  Top Layer w25: P201.3@1400,2870 1401.3,2871.3 M201.12@1556.23,2871.3
P1.4/MISO: M201.11 P201.4 | length 176.4
  Top Layer w25: P201.4@1400,2970 1448.7,2921.3 M201.11@1556.23,2921.3
P1.5/MOSI: M201.10 P201.5 | length 197.1
  Top Layer w15: P201.5@1400,3070 1498.7,2971.3 M201.10@1556.23,2971.3
P1.6/TX0: M201.9 P201.8 | length 441.3
  Top Layer w10: P201.8@1400,3370 1450,3320 1450,3080 1508.7,3021.3 M201.9@1556.23,3021.3
P1.7/RX0: M201.8 P201.9 | length 503
  Top Layer w10: P201.9@1400,3470 1410,3470 1470,3410 1470,3100 1498.7,3071.3 M201.8@1556.23,3071.3
P2.0: M201.7 P201.10 | length 551.6
  Top Layer w10: P201.10@1400,3570 1445,3570 1460,3555 1460,3473.63 1486,3447.63 1486,3135 1499.7,3121.3 M201.7@1534.94,3121.3
P2.1/DD: M201.6 P203.3 | length 944.3
  Top Layer w15: M201.6@1556.23,3171.3 1983.7,3171.3 1985,3170 v4(2000,3170)
  Bottom Layer w15: P203.3@2000,2670 v4(2000,3170)
P2.2/DC: M201.5 P203.4 | length 897.4
  Top Layer w15: M201.5@1556.23,3221.3 1891.3,3221.3 v4(1895,3225)
  Bottom Layer w15: v4(1895,3225) 1895,2675 P203.4@1900,2670
PA0/CTS1: SB813.2 SB817.2 U801.6 | length 1751.1
  Top Layer w10: SB817.2@223,1172 230,1165 v2(265,1165) ; U801.6@562.2,603.27 562.2,662.8 476,749 421,749 390,780 390,940 490,1040 825,1040 920,945 920,730 980,670 1067.14,670 SB813.2@1077,660.14
  Bottom Layer w10: v2(265,1165) 300,1165 v2(455,1010)
PA1/RTS1: SB814.2 SB818.2 U801.7 | length 2154.4
  Top Layer w10: SB818.2@218,1070 v2(265,1070) ; U801.7@536.61,603.27 536.61,665.76 469.37,733 412,733 374,771 374,979 451,1056 831.63,1056 940,947.63 940,755 975,720 1245,720 1265,700 1265,655 1230,620 1095,620 1077,602 SB814.2@1077,573.43
  Bottom Layer w10: v2(265,1070) 330,1070 v2(400,1000)
PA2/TX1: SB812.2 U801.8 | length 1466.8
  Top Layer w10: U801.8@511.02,603.27 511.02,668.72 462.75,717 400.63,717 358,759.63 358,1008 422,1072 838.25,1072 858.25,1052 883,1052 990,945 990,795 1015,770 1067.86,770 SB812.2@1077,760.86
PA3/RX1: SB811.2 U801.9 | length 1405
  Top Layer w10: U801.9@485.43,603.27 485.43,671.68 456.12,701 394,701 342,753 342,1017 413,1088 844.88,1088 857.88,1075 905,1075 1015,965 1015,905 1050,870 1080.57,870 SB811.2@1082,868.57
PA4/SS: SB809.2 SB810.2 U801.10 | length 2067.1
  Top Layer w10: SB809.2@223,163 362,163 370,155 v2@370,160 ; U801.10@459.84,603.27 459.84,674.65 449.49,685 v2(355,685) 350,685 326,709 326,1026 404,1104 898.63,1104 1032.63,970 1081.29,970 SB810.2@1082,969.29
  Bottom Layer w10: v2(355,685) 370,670 v2(370,165) v2@370,160
PA5/SCK: SB801.2 SB808.2 U801.11 | length 1946.7
  Top Layer w10: SB808.2@218,265.68 330.68,265.68 335,270 440,270 459.84,289.84 U801.11@459.84,386.73 ; v2@329,554 305,578 305,1040 390,1125 925,1125 985,1065 SB801.2@1072,1065
  Bottom Layer w10: v2(325.43,275) v2(325.43,550)
PA6/MISO: SB807.2 SB815.2 U801.12 | length 1315
  Top Layer w10: SB807.2@215,370 230,370 309,449 468.37,449 485.43,431.94 U801.12@485.43,386.73 485.43,290.43 476.75,281.75 v2(476.75,241.75) ; v2(1010,240) 1010,435 1040,465 1070.71,465 SB815.2@1077,458.71
  Bottom Layer w10: v2(476.75,241.75) 1008.25,241.75 v2(1010,240)
PA7/MOSI: SB806.2 SB816.2 U801.13 | length 1293.9
  Top Layer w10: SB806.2@223,460.03 227.97,465 475,465 511.02,428.98 U801.13@511.02,386.73 512.43,385.32 512.43,213.82 512,213.38 v2(512,195) v2@512,188 ; v2(1054.43,194) 1054.43,349.43 SB816.2@1077,372
  Bottom Layer w10: v2(512,195) 522,205 579,205 600,184 v2@1059,184
PA9/SCL1/TX1: SB804.1 SB805.1 U801.17 | length 1050
  Top Layer w10: SB805.1@223,657 223,633 210,620 75,620 35,580 35,550 65,520 252.37,520 285.37,487 573,487 613.39,446.61 U801.17@613.39,386.73 ; SB805.1@223,673 SB804.1@223,778
PA10/SDA1/RX1: SB802.1 SB803.1 U801.18 | length 885.1
  Top Layer w10: SB802.1@223,862 270,815 270,625 223,578 257,578 270,565 270,525 292,503 597,503 638.98,461.02 U801.18@638.98,386.73
PB1/TIM3_CH4: P802.2 SB819.2 U801.14 | length 1637.9
  Top Layer w10: SB819.2@218,965 v2(270,965) ; v2(538.23,455) 536.61,456.61 U801.14@536.61,386.73 536.61,253.39 565,225 v2@565,170 ; v2@560,170 v2(560,172.5)
  Bottom Layer w10: v2(270,965) 535,700 v2@535,450 ; v2(560,172.5) 565.5,167 1065.62,167 1071.12,172.5 1167.5,172.5 1185,155 P802.2@1200,170
RX0: P602.3 P603.9 | length 268.6
  Bottom Layer w10: P603.9@2695,895 2900,895 P602.3@2945,850
RX1: P801.9 SB802.2 | length 87.8
  Top Layer w10: P801.9@100,870 102,872 SB802.2@187,872
RXD: LD1.1 P602.1 U601.3 | length 758.7
  Top Layer w10: LD1.1@2890,1155 2890,1010 2905,995 2955,995 2990,960 2990,905 P602.1@3045,850 3075,850 3105,820 3105,688.98 3155,638.98 U601.3@3241.06,638.98
RXD0: M401.21 P401.9 | length 1058.8
  Top Layer w10: P401.9@1400,2170 1435,2170 1465,2200 1465,2255 1495,2285 2035,2285 2085,2235 2085,2140 2125,2100 2241.42,2100 M401.21@2245.16,2096.26
SCL: P603.7 U601.16 | length 1481.1
  Top Layer w10: P603.7@2695,695 2800,695 2850,645 2850,345 2965,230 3330,230 3430,330 3430,570 3447.8,587.8 U601.16@3518.94,587.8
SCL1: P801.7 SB805.2 | length 92
  Top Layer w10: P801.7@100,670 112,658 SB805.2@187,658
SDA: P603.6 U601.15 | length 1404.6
  Top Layer w10: P603.6@2695,595 2785,595 2815,565 2815,335 2940,210 3345,210 3446,311 3446,551 3457.2,562.2 U601.15@3518.94,562.2
SDA1: P801.6 SB803.2 | length 92
  Top Layer w10: P801.6@100,570 SB803.2@192,570
SWCLK: P803.4 U801.20 | length 354.1
  Top Layer w10: P803.4@600,70 690.16,160.16 U801.20@690.16,386.73
SWDIO: P803.3 U801.19 | length 503.3
  Top Layer w10: U801.19@664.57,386.73 664.57,444.57 675,455 700,455 725,430 725,95 P803.3@700,70
TX0: P602.2 P603.8 | length 368.6
  Bottom Layer w10: P603.8@2695,795 3000,795 P602.2@3045,750
TX1: P801.8 SB804.2 | length 92
  Top Layer w10: P801.8@100,770 SB804.2@192,770
TXD: LD1.2 P602.4 U601.4 | length 891.9
  Top Layer w10: LD1.2@2845,1160 2845,795 2890,750 P602.4@2945,750 2945,655 2986.61,613.39 U601.4@3241.06,613.39
TXD0: M401.22 P401.8 | length 1292.3
  Top Layer w10: P401.8@1400,2070 1355,2070 1330,2095 1330,2300 1350,2320 1455,2320 1470,2305 2040,2305 2101,2244 2101,2204 2130,2175 M401.22@2245.16,2175
VBAT: BT701.1 D702.1 P702.6 | length 1016.7
  Top Layer w25: P702.6@3015,1350.11 3024.89,1350.11 3060,1315 3570,1315 3655,1400 3655,1520 D702.1@3625,1550 3630,1555 3630,1600 3600,1630 BT701.1@3600,1700
VDD_PA: C114.1 L105.1 U101.30 | length 158.2
  Top Layer w8: C114.1@519.68,3005 L105.1@561.3,3005 561.3,3046.3 595.75,3080.75 U101.30@595.75,3107.28
XC1: C102.1 U101.37 X102.1 | length 299.6
  Top Layer w7: X102.1@924.97,3082.94 947.18,3060.73 C102.1@978.86,3060.73
  Top Layer w8: U101.37@722.72,3139.76 785.24,3139.76 835,3090 860,3090 880,3070 912.03,3070 X102.1@924.97,3082.94
XC2: C103.1 U101.38 X102.3 | length 210.2
  Top Layer w8: U101.38@722.72,3155.51 845.51,3155.51 C103.1@861.08,3171.08 ; C103.1@867.92,3169.24 X102.3@933.32,3169.24
XL1: C104.1 SB102.2 U101.46 X101.1 | length 458.3
  Top Layer w8: U101.46@722.72,3281.5 781.5,3281.5 880,3380 880,3437.02 X101.1@921.06,3478.08 ; C104.1@871.08,3501.08 894.08,3478.08 X101.1@921.06,3478.08 ; SB102.2@992.32,3512.78 955.75,3512.78 X101.1@921.06,3478.08
XL2: C101.1 SB101.2 U101.45 X101.2 | length 441
  Top Layer w8: U101.45@722.72,3265.75 815.75,3265.75 915,3365 950,3365 X101.2@990.66,3405.66 ; X101.2@990.66,3408.49 X101.2@990.66,3405.66 ; SB101.2@1037.22,3312.68 1037.22,3334.94 C101.1@1011.08,3361.08 990.66,3381.5 X101.2@990.66,3405.66
pads on no net: A301.1B A301.1C A301.1D A301.1E A301.1F A301.1G A301.1H A301.1J A301.1K A301.1L BT701.0 CN601.4 M401.2 M401.4 M401.5 M401.6 M401.7 M401.9 M401.10 M401.11 M401.12 M401.13 M401.14 M401.17 M401.19 M401.20 P103.6 P202.12 P203.6 P302.12 P303.6 P401.2 P401.3 P401.4 P401.5 P401.6 P401.7 P401.10 P401.11 P401.12 P402.2 P402.3 P402.4 P402.5 P402.6 P402.7 P402.8 P402.9 P402.10 P402.11 P402.12 P403.3 P403.4 P403.6 P601.3 P601.4 P601.6 P603.2 P603.3 P603.4 P603.5 P603.10 P603.11 P603.12 P701.2 P701.3 P701.4 P701.5 P701.8 P701.9 P702.3 P702.4 P702.5 P802.3 P802.12 P803.6 P901.2 P901.3 P901.4 P901.5 P901.8 P901.9 P901.10 P901.11 P901.12 P902.3 P902.4 P902.5 P902.6 S601.0 S601.MH1 S601.MH2 S801.0 S801.MH1 S801.MH2 U601.2 U601.5 U601.14 U601.17 U601.18 U701.7 X701.2 X701.3
copper on no net: | length 40
  Top Layer w20: 3595,2769.69 3635,2769.69
  other v1: 3715,3385 3410,3565 3460,3565 3510,3565 3560,3565 3610,3565 3660,3565 3710,3565 3410,3615 3460,3615 3510,3615 3560,3615 3610,3615 3660,3615 3710,3615 3410,3665 3460,3665 3510,3665 3560,3665 3610,3665 3660,3665 3710,3665 2865,3740 2915,3740 2965,3740 3015,3740 3065,3740 2860,3795 2915,3795 2965,3795 3065,3795 3020,3800

## Keep-outs
Keep-Out Layer:
  lines w10: 3915,-10 10,-10 0,0 0,3905 3925,3905 3925,-10

## Other copper
Top Layer:
  region net NetC310_1: 3284,3555 3284,3492 3260,3492 3260,3513 3225,3513 3225,3537 3258,3537 3258,3555
  region net GND: 3447,2895 3382,2895 3382,2873 3447,2873
  region net NetC309_2: 3302,3418 3242,3418 3242,3442 3260,3442 3260,3477 3284,3477 3284,3443 3302,3443
  pour cut-out: 3250,2992 3250,2999 3362,2999 3362,2992
  pour cut-out: 3179,3004 3179,3172 3194,3172 3194,3004
  pour cut-out: 3194,3172 3194,3164 3360,3164 3360,3172
  pour cut-out: 3357,2996 3357,3164 3362,3164 3362,2996

## Silkscreen, mask and mechanical layers (free items; w line width, h text height)
Top Overlay:
  lines w10: 5,1300 1305,1300 ; 5,2605 1305,2605 1305,3905 ; 192,1350 ccw(c247,1402) 299,1347 ; 196.28,43.58 ccw(c251.28,95.58) 303.28,40.58 ; 996,3808 cw(c1048,3753) 1103,3805 ; 1305,0 1305,1300 ; 1305,2600 1305,1300 ; 1310,1300 2610,1300 ; 1310,2605 2610,2605 2610,3905 ; 1320,-5 2600,-5 ; 1487,1360 ccw(c1542,1412) 1594,1357 ; 1497,2660 ccw(c1552,2712) 1604,2657 ; 2610,0 2610,1300 ; 2610,2600 2610,1300 ; 2620,1300 3920,1300 ; 2620,2605 3920,2605 3920,3905 ; 2792,50 ccw(c2847,102) 2899,47 ; 2792,1365 ccw(c2847,1417) 2899,1362 ; 2793.34,2650 ccw(c2848.34,2702) 2900.34,2647 ; 2905,935 3080,935 ; 3115,890 3115,815 3155,775 3155,705 ; 3920,0 3920,1300 ; 3920,2600 3920,1300
  text "W" at 1076,3795 h80 r180
  text "A1" at 270,3790 h39.37 r180
  text "i i" at 1114,3772 h60 r180
  text "nRF51822" at 725,3700 h33.46 r180
  text "Wikiot-CC2540" at 3000,2740 h33.46
  text "Wikiot-CC2530-SZ" at 1670,2730 h33.46
  text "i i" at 1486,2693 h60
  text "i i" at 2782.34,2683 h60
  text "W" at 1524,2670 h80
  text "A1" at 3655,2670 h39.37
  text "A1" at 2315,2660 h39.37
  text "W" at 2820.34,2660 h80
  text "H" at 755,2338 h80
  text "N" at 1157,2291 h80
  text "ESP-12-WIFI" at 1770,1465 h33.46
  text "Wikiot-24C EEPROM" at 370,1450 h33.46
  text "Wikiot-PCF8563" at 2990,1440 h33.46
  text "i i" at 2781,1398 h60
  text "i i" at 1476,1393 h60
  text "i i" at 181,1383 h60
  text "W" at 2819,1375 h80
  text "W" at 1514,1370 h80
  text "W" at 219,1360 h80
  text "Rev.A1" at 3630,1360 h39.37
  text "Rev.A1" at 1015,1350 h39.37
  text "RXD" at 2775,870 h40
  text "TXD" at 2770,770 h40
  text "SCL" at 2775,675 h40
  text "SDA" at 2775,570 h40
  text "Wikiot-STM32F0" at 375.1,143.58 h33.46
  text "Wikiot-Power&Com" at 2965,130 h33.46
  text "i i" at 2781,83 h60
  text "i i" at 185.28,76.58 h60
  text "W" at 2819,60 h80
  text "W" at 223.28,53.58 h80
  text "A1" at 1015,50 h39.37
  text "Rev.A1" at 3580,45 h39.37
Bottom Overlay:
  text "H" at 2440,3673 h80
  text "H" at 3100,3658 h80
  text "N" at 2038,3626 h80
  text "N" at 2698,3611 h80
  text "N" at 592,2874 h80 r180
  text "H" at 190,2827 h80 r180
  text "H" at 2370,2373 h80
  text "H" at 3830,2353 h80
  text "N" at 1968,2326 h80
  text "N" at 3428,2306 h80
  text "H" at 1115,1083 h80
  text "H" at 3835,1078 h80
  text "N" at 713,1036 h80
  text "N" at 3433,1031 h80

## Text inside footprints (layer, text, board x,y; h text height)
M401: Mechanical 13 "ANTENNA AREA" at 1635,2485 h10; Mechanical 13 "CUTOUT POLYGON" at 1635,2465 h10